# Altium PCB ALCT_MEZ_LX150T.PcbDoc (part 4 of 9)
Units mil, origin at the board's own origin, x right, y up, seen from the top; angles counter-clockwise.
Board outline 4101.98 x 5875.01 mil, 12 copper layers (Top Layer, Mid-Layer 1, +3V3, Mid-Layer 2, +1V2, Mid-Layer 4, +2V5, Mid-Layer 5, GND1, Mid-Layer 7, GND2, Bottom Layer), stack 64.7 mil thick; 378 components, 616 nets, 2492 pads, 1686 vias.
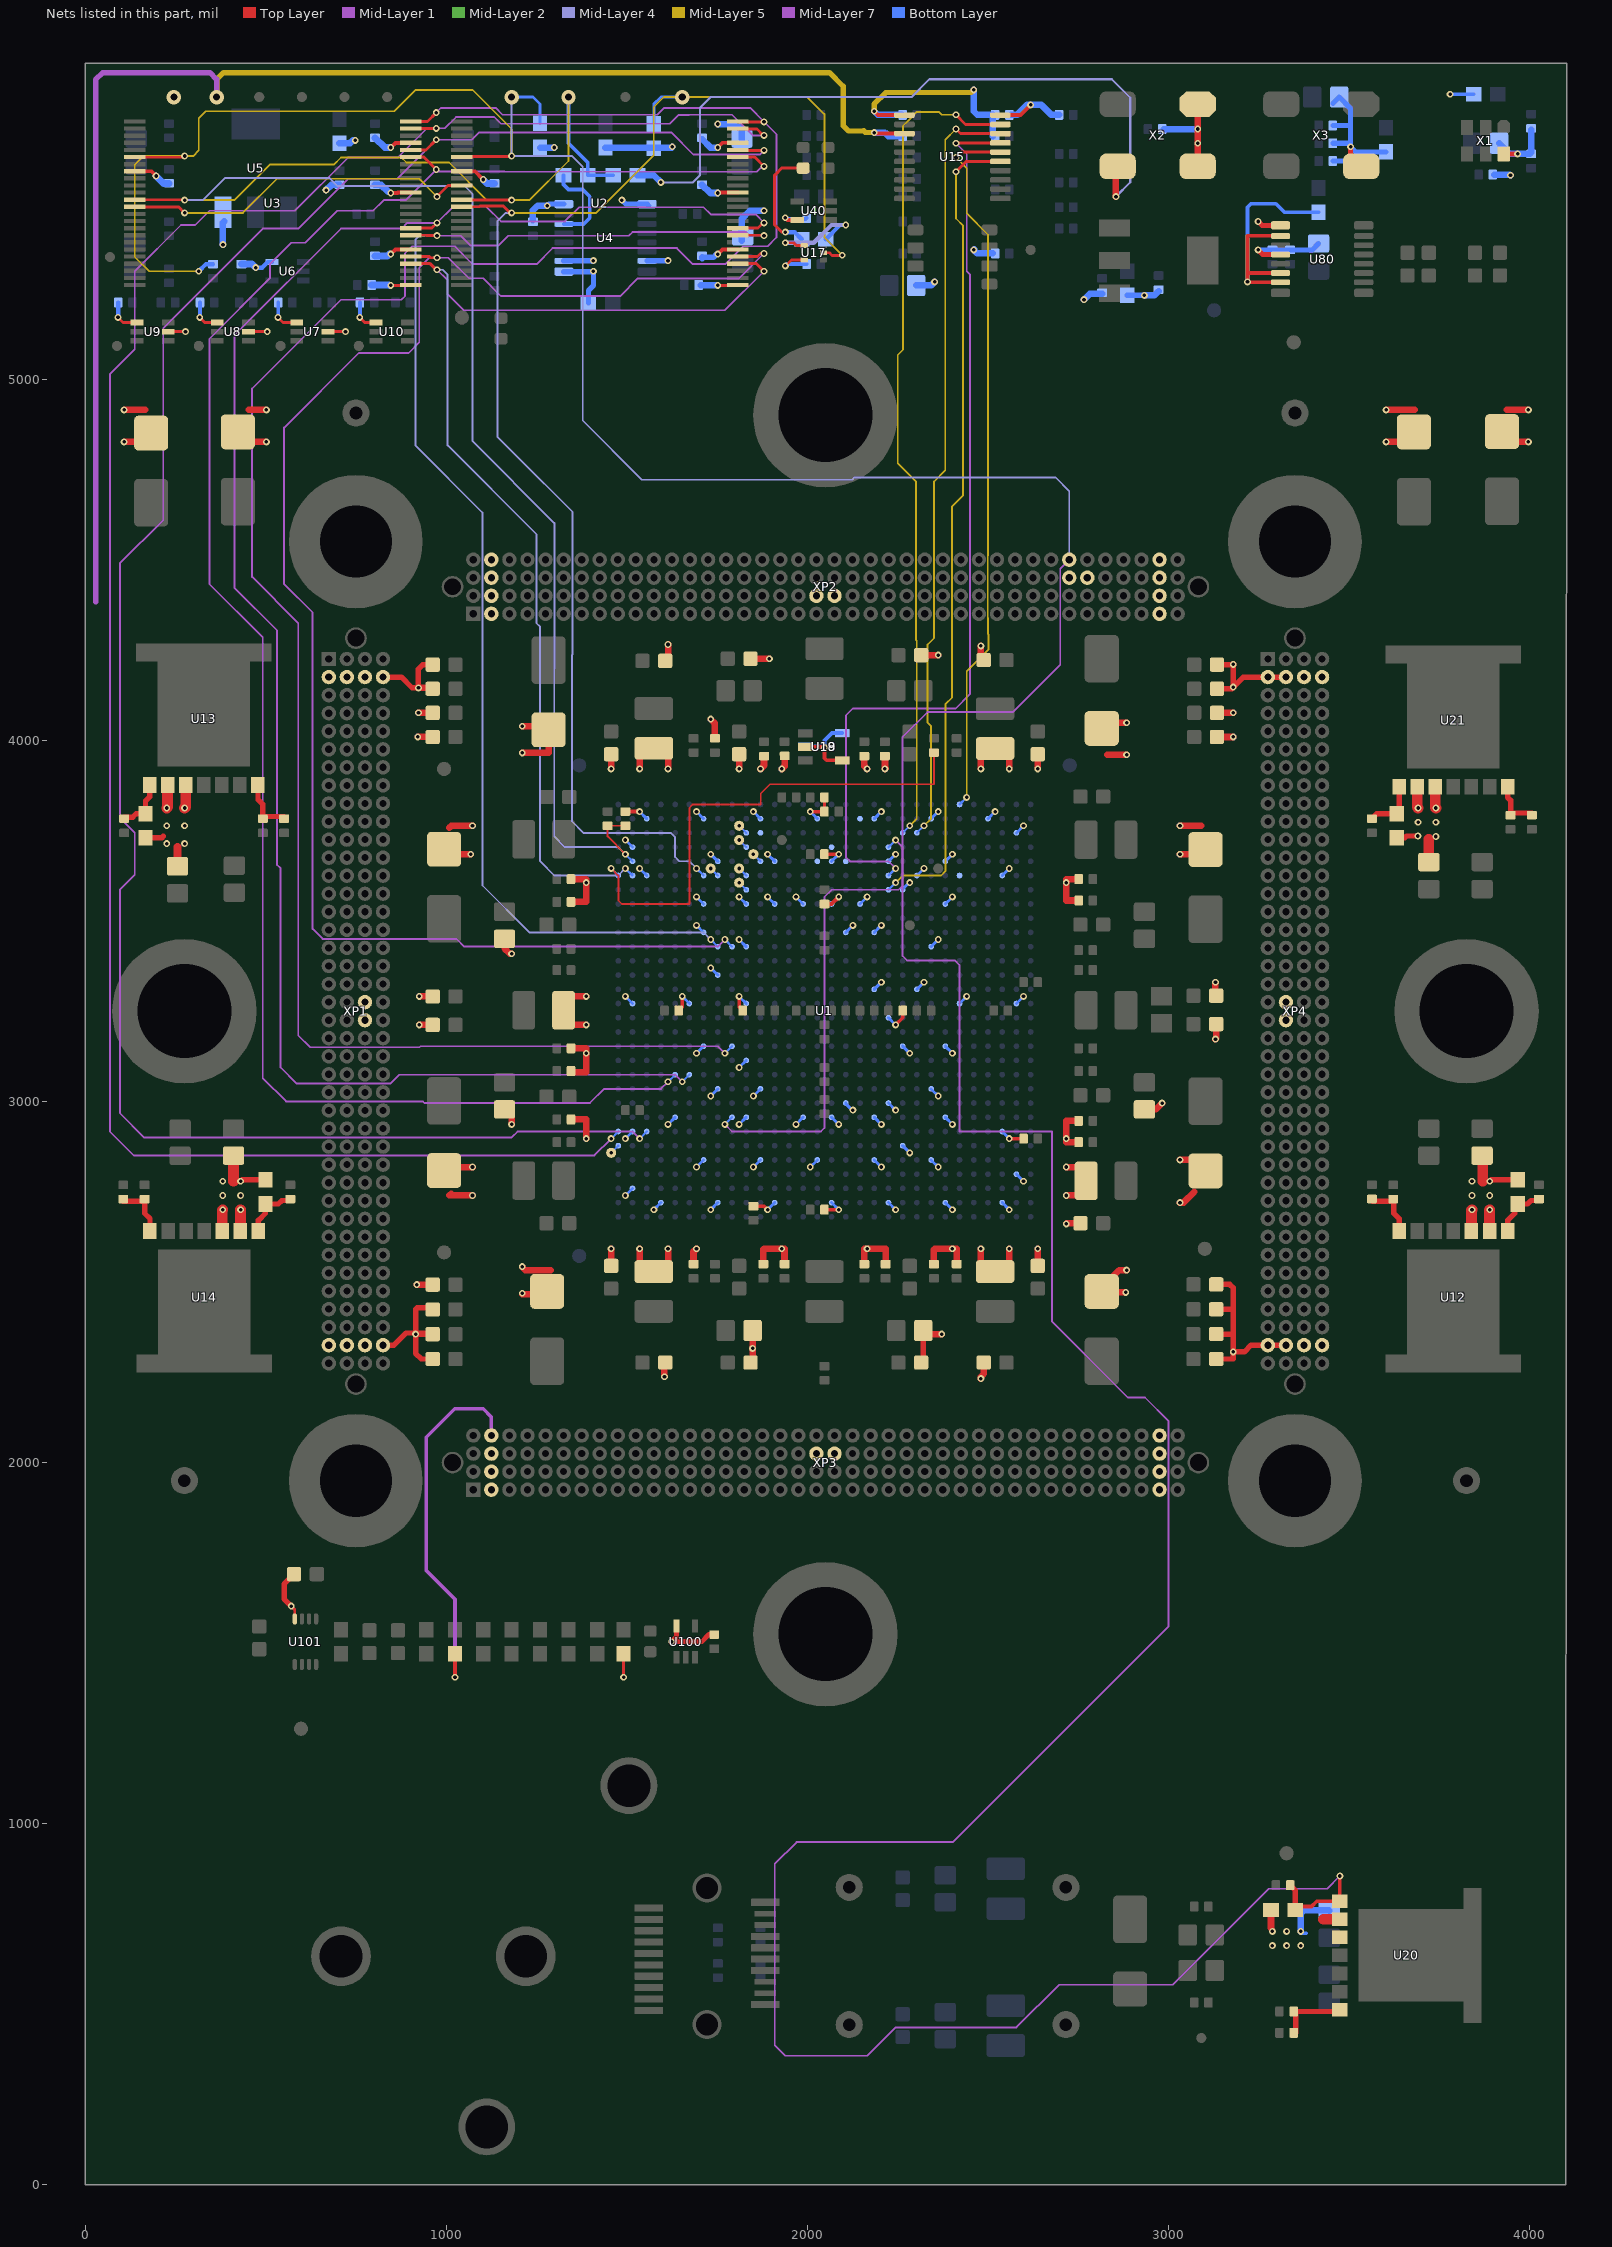
[diagram p13: the nets of this part, all layers, seen from the top]

## Via types
v1: diameter 19, hole 10, Top Layer to Bottom Layer, tented both sides, 1667 vias
v2: diameter 40, hole 20, Top Layer to Bottom Layer, 12 vias
v3: diameter 19, hole 10, Top Layer to Bottom Layer, 7 vias

## Nets (pads, with @x,y where several pads share a name; then routed paths per layer and width w, separated by ;. In a path a pad name is that pad's centre, name@x,y a point inside that pad or via, vN(x,y) a via of type N, cw(c..) or ccw(c..) an arc to the next point about the centre after c; other vN are vias at no path point) (continued)
+3V3: 3V3.1 C1.1 C2.1 C3.1 C6.1 C17.1 C28.1 C29.1 C30.1 C32.1 C40.1 C42.1 C44.1 C46.1 C50.1 C51.1 C52.1 C53.1 C54.1 C61.1 C62.1 C63.1 C64.1 C65.1 C72.1 C73.1 C74.1 C75.1 C76.1 C77.1 C78.1 C82.1 C83.1 C84.1 C85.1 C99.1 C109.1 C118.1 C119.1 C120.1 C121.1 C122.1 C126.1 C127.1 C128.1 C132.1 C133.1 C134.1 C135.1 C139.1 C140.1 C141.1 C145.1 C146.1 C147.1 C148.1 C201.1 C202.1 C203.1 C204.1 C205.1 C211.1 C212.1 C213.1 C214.1 C215.1 C221.1 C222.1 C223.1 C224.1 C225.1 C231.1 C232.1 C233.1 C234.1 C235.1 C241.1 C242.1 C243.1 C244.1 C251.1 C252.1 C253.1 C254.1 C301.1 C302.1 C311.1 C312.1 C321.1 C322.1 C331.1 C332.1 C341.1 C342.1 C351.1 C401.1 C411.1 C421.1 C431.1 C441.1 C451.1 CT1.1 CT2.1 CT3.1 CT4.1 CT5.1 CT6.1 R2.1 R5.1 R13.1 R16.1 R20.1 R26.1 R40.1 R42.1 R43.1 R44.1 R51.2 R55.1 R56.1 R58.1 R81.1 R82.1 R107.1 U1.AA8 U1.AA12 U1.AA16 U1.AA20 U1.AA23 U1.AC2 U1.AC10 U1.AC18 U1.AC26 U1.AD5 U1.AD13 U1.AD21 U1.AD23 U1.AD29 U1.AE16 U1.AF8 U1.AG2 U1.AH25 U1.AH29 U1.AJ3 U1.AJ7 U1.AJ16 U1.AJ27 U1.B4 U1.B16 U1.B28 U1.C2 U1.C7 U1.C25 U1.D29 U1.F16 U1.G2 U1.G8 U1.G13 U1.G23 U1.G26 U1.H5 U1.H10 U1.H20 U1.H29 U1.J17 U1.J25 U1.K6 U1.K13 U1.K24 U1.L2 U1.L9 U1.L15 U1.L26 U1.M5 U1.M8 U1.M17 U1.M21 U1.M29 U1.N23 U1.P9 U1.P21 U1.R2 U1.R8 U1.R23 U1.R26 U1.T5 U1.T29 U1.U8 U1.U23 U1.W2 U1.W23 U1.W26 U1.Y5 U1.Y10 U1.Y29 U2.8 U2.30 U2.38 U2.45 U3.8 U3.30 U3.38 U3.45 U4.1 U4.7 U4.9 U4.10 U4.16 U5.3 U6.5 U7.1 U7.5 U8.1 U8.5 U9.1 U9.5 U10.1 U12.2 U12.3 U13.2 U13.3 U15.20 U17.5 U18.2 U18.4 U19.2 U19.4 U20.2 U20.3 U40.5 U80.1 U80.4 U100.5 U101.8 X1.6 X2.1 X2.4 X3.4 XP1.A2 XP1.A39 XP1.B2 XP1.B39 XP1.C21 XP2.B21 XP2.C2 XP2.C39 XP2.D2 XP2.D39 XP3.A2 XP3.A39 XP3.B2 XP3.B39 XP3.C21 XP4.B21 XP4.C2 XP4.C39 XP4.D2 XP4.D39 | length 13269.6
  Top Layer w8: v1(91.21,5170.67) 104.99,5156.9 U9.1@143.7,5156.9 U9.1@146.33,5156.9 ; U9.5@232.94,5131.3 v1(278.22,5131.3) ; v1(317.59,5170.67) 331.37,5156.9 U8.1@366.14,5156.9 U8.1@372.7,5156.9 ; U8.5@459.32,5131.3 v1(504.59,5131.3) ; v1(534.12,5170.67) 547.9,5156.9 U7.1@585.96,5156.9 U7.1@589.24,5156.9 ; v1(570.87,1602.56) 580.71,1592.72 U101.8@580.71,1567.13 ; U7.5@675.85,5131.3 v1(721.13,5131.3) ; v1(760.5,5170.67) 774.28,5156.9 U10.1@805.77,5156.9 U10.1@815.62,5156.9 ; v1(1491.14,1405.56) R107.1@1491.14,1460.67 ; v1(1938.98,5313.39) 1955.71,5330.12 U17.5@1991.14,5330.12 ; C222.1@2047.24,3802.56 R13.1@2047.24,3841.93
  Top Layer w10: C202.1@1643.7,3251.38 1653.56,3261.24 v1(1653.56,3290.75) ; v1(1751.97,5641.15) 1764.96,5654.14 U2.45@1807.09,5654.14 ; v1(1811.03,3290.75) 1811.03,3261.22 C221.1@1820.87,3251.38 ; C232.1@1850.39,2710.04 1879.92,2710.04 v1(1889.76,2700.2) ; U18.2@1994.09,3981.7 2045.28,3981.7 v1(2047.24,3979.73) 2047.24,3950.2 2053.15,3944.3 U18.4@2096.46,3944.3 ; v1(2007.88,3802.54) C222.1@2047.24,3802.56 ; C242.1@2047.24,2700.2 v1(2086.61,2700.2) ; C211.1@2047.24,3684.45 v1(2086.63,3684.45) ; v1(2244.09,3212) 2263.78,3231.68 C212.1@2263.78,3251.38 ; C135.1@2314.96,2276.97 C135.1@2320.87,2282.88 ; v1(2559.06,2897.05) C252.1@2598.43,2897.05 ; U12.2@3888.58,2631.3 3889.37,2632.09 U12.2@3889.37,2641.15
  Top Layer w11: U3.8@137.8,5575.4 183.86,5575.4 v1(196.85,5562.41) ; v1(846.46,5345.87) 859.45,5358.86 U3.30@901.57,5358.86 ; v1(846.46,5515.16) 864.96,5515.16 866.14,5516.34 U3.38@901.57,5516.34 ; v1(846.46,5641.15) 859.45,5654.14 U3.45@901.57,5654.14 ; U2.8@1043.31,5575.4 1079.53,5575.4 v1(1102.36,5552.56) ; v1@1748.03,5515.16 1749.21,5516.34 U2.38@1807.09,5516.34 ; v1(1751.97,5345.87) 1764.96,5358.86 U2.30@1807.09,5358.86 ; v1@1938.74,5446.18 1944.56,5440.36 U40.5@1972.44,5440.36 ; U15.20@2534.45,5730.71 2589.57,5730.71 v1(2618.11,5759.26)
  Top Layer w12: R56.1@1496.06,3802.56 v1(1535.45,3802.54) ; C223.1@2047.24,3546.66 2066.95,3546.66 v1(2086.63,3566.33)
  Top Layer w14: U100.5@1637.8,1547.45 1637.8,1517.92 v1(1624.02,1504.14) 1707.46,1504.14 1727.14,1523.82 C109.1@1742.13,1523.82 ; v1(3248.03,5357.68) 3260.83,5344.89 U80.4@3310.04,5344.89 ; v1(3248.03,5436.42) 3258.86,5425.6 U80.1@3310.04,5425.6 ; v1(3503.94,5643.12) 3503.94,5618.51 X3.4@3523.62,5598.82 ; X1.6@3927.95,5623.43 v1(3966.54,5623.43)
  Top Layer w15: R5.1@167.32,3729.73 212.6,3729.73 216.54,3733.67 ; v1(570.87,1602.56) 551.18,1622.25 551.18,1663.59 C118.1@578.74,1691.15 ; C135.1@2320.87,2282.88 C332.1@2320.87,2365.56 ; v1(3889.37,2778.94) 3893.31,2782.88 R16.1@3958.27,2782.88
  Top Layer w18: v1(108.27,4826.19) 157.48,4826.19 CT1.1@185.04,4853.75 ; v1(108.27,4914.77) 167.32,4914.77 ; CT2.1@429.13,4854.53 457.48,4826.19 v1(501.97,4826.19) ; 452.76,4914.77 v1(501.97,4914.77) ; v1(918.5,2492.72) C122.1@960.63,2492.72 ; v1(921.26,4009.26) C139.1@962.6,4009.26 967.72,4009.26 C139.1@968.5,4008.47 ; v1(925.2,3290.75) 961.42,3290.75 C121.1@968.5,3283.67 ; CT3.1@996.06,2807.68 1006.69,2818.31 v1(1072.83,2818.31) ; 1008.86,3758.27 1013.78,3763.19 v1(1072.83,3763.19) ; 1013.78,2744.49 1008.86,2739.57 v1(1072.83,2739.57) ; CT5.1@1021.16,3684.45 v1(1067.91,3684.45) ; C312.1@1161.42,2977.76 1181.1,2958.08 v1(1181.1,2936.42) ; C302.1@1161.42,3450.2 1161.42,3423.63 1176.18,3408.86 v1(1181.1,3408.86) ; C201.1@1342.52,3147.05 C201.1@1345.49,3147.05 1387.8,3147.05 v1(1387.8,3133.27) 1387.8,3080.12 C225.1@1345.49,3080.12 ; C234.1@1345.49,2950.2 1387.8,2950.2 v1(1387.8,2897.05) ; C243.1@1345.49,3552.56 1387.8,3552.56 v1(1387.8,3605.71) 1387.8,3615.56 C213.1@1345.49,3615.56 ; v1(1387.8,3212.01) 1324.8,3212.01 C421.1@1324.8,3252.56 1324.8,3290.75 v1(1387.8,3290.75) ; C331.1@1456.69,2546.87 v1(1456.69,2591.93) ; v1(1456.69,3920.67) C311.1@1456.69,3961.23 ; v1(1535.43,2591.93) 1535.43,2528.94 C431.1@1574.8,2528.94 1614.17,2528.94 v1(1614.17,2591.93) ; v1(1535.43,3920.67) 1535.43,3977.76 C411.1@1574.8,3977.76 1614.17,3977.76 v1(1614.17,3920.67) ; C411.1@1573.71,3978.85 1574.8,3979.94 C411.1@1575.89,3978.85 ; C431.1@1574.41,2528.55 1574.8,2528.16 C431.1@1575.2,2528.55 ; v1(1604.33,2237.6) 1604.33,2275.01 C126.1@1606.3,2276.97 ; C2.1@1606.3,4219.89 1614.17,4227.76 v1(1614.17,4265.16) ; v1(1732.28,4058.47) 1744.09,4046.66 R51.2@1744.09,4011.23 ; v1(1811.02,3920.67) C321.1@1811.02,3961.23 ; C127.1@1842.52,2276.97 1848.43,2282.88 v1(1848.43,2316.34) C322.1@1848.43,2365.56 ; C120.1@1842.52,4225.79 v1(1894.68,4225.79) ; 1877.95,2589.97 1879.92,2591.93 v1(1929.13,2591.93) ; C203.1@2157.48,2549.63 2157.48,2591.93 v1(2165.35,2591.93) 2216.54,2591.93 C204.1@2216.54,2549.63 ; v1(2214.57,3920.67) v1@2216.54,3922.64 ; C140.1@2312.99,4235.64 C140.1@2314.96,4235.64 v1(2362.2,4235.64) ; C332.1@2320.87,2365.56 2330.71,2355.71 v1(2372.05,2355.71) ; C254.1@2350.39,2549.63 2350.39,2589.97 2352.36,2591.93 v1(2401.57,2591.93) 2413.39,2591.93 C241.1@2413.39,2549.63 ; v1(2480.32,2232.68) 2480.32,2237.6 2488.19,2245.48 C128.1@2488.19,2276.97 ; v1(2480.32,2591.93) 2480.32,2528.16 2559.06,2528.16 v1(2559.06,2591.93) ; v1(2480.32,3920.67) 2480.32,3979.94 2559.06,3979.94 v1(2559.06,3920.67) ; v1(2480.32,4261.23) 2480.32,4229.73 C1.1@2488.19,4221.86 ; C341.1@2637.8,2546.87 v1(2637.8,2591.93) ; v1(2637.8,3920.67) C351.1@2637.8,3961.23 ; v1(2716.54,2660.83) 2717.72,2662.01 C301.1@2752.94,2662.01 ; v1(2716.54,2739.57) 2771.65,2739.57 C401.1@2771.65,2780.12 2771.65,2818.31 v1(2716.54,2818.31) ; 2716.54,3556.5 v1(2716.54,3605.71) 2716.54,3615.56 C214.1@2750.97,3615.56 ; C235.1@2750.97,2887.21 2716.54,2887.21 v1(2716.54,2897.05) 2716.54,2946.27 C253.1@2750.97,2946.27 ; CT4.1@2811.02,4024.22 2835.43,4048.63 v1(2883.86,4048.63) ; 2829.72,3960.05 v1(2883.86,3960.05) ; C342.1@2933.07,2977.76 2964.57,2977.76 v1(2982.28,2995.48) ; v1(3031.5,2719.89) 3041.34,2719.89 3070.87,2749.41 ; v1(3031.5,2838) CT6.1@3072.05,2838 ; X2.4@3080.71,5588.98 X2.1@3080.71,5761.23 ; v1(3129.92,3330.12) 3129.92,3294.69 C134.1@3131.89,3292.72 ; C141.1@3133.86,4008.47 C141.1@3134.65,4009.26 ; C132.1@3134.65,4076.19 v1(3179.13,4076.19)
  Top Layer w19: C233.1@1685.04,2549.63 1685.04,2584.06 v1(1692.91,2591.93) ; v1(1870.08,3920.67) 1879.92,3930.52 C205.1@1879.92,3956.35 ; C224.1@1877.95,2549.63 1877.95,2589.97 ; v1(1929.13,3920.67) 1937.18,3928.72 C30.1@1937.18,3956.56 ; C231.1@1937.01,2549.63 v1@1937.01,2591.93 ; C251.1@2157.48,3956.35 2157.48,3928.55 v1(2165.35,3920.67) ; v1(2214.57,3920.67) C215.1@2214.57,3956.35 ; 2716.54,3556.5 C244.1@2750.97,3556.5 ; C141.1@3133.86,4009.26 3134.65,4009.26 v1(3179.13,4009.26) ; 3283.46,711.82 R2.1@3283.46,761.03 R2.1@3283.46,770.87
  Top Layer w22: C6.1@255.91,3650.99 255.91,3704.14
  Top Layer w24.02: U12.3@3838.58,2631.3 U12.3@3838.58,2641.15 v1(3840.16,2700.2)
  Top Layer w30: v1(226.38,3812.41) 228.74,3814.77 U13.2@228.74,3876.19 ; v1(275.59,3812.41) 278.74,3815.56 U13.3@278.74,3876.19 ; 3429.13,735.44 U20.2@3474.41,735.44 ; U12.3@3838.58,2641.15 3838.58,2698.63 v1(3840.16,2700.2) ; 3869.69,2778.94 C17.1@3869.69,2849.81 ; U12.2@3888.58,2641.15 3889.37,2641.93 v1(3889.37,2700.2) 3888.58,2699.41 U12.2@3888.58,2641.15
  Bottom Layer w8: v1@1496.08,2739.57 U1.AJ3@1515.75,2759.26 ; v1(1496.06,2897.05) U1.AJ7@1515.75,2916.74 ; v1(1496.07,3290.75) U1.AJ16@1515.75,3271.07 ; v1(1496.08,3723.82) U1.AJ27@1515.75,3704.14 ; v1(1535.44,3645.07) U1.AH25@1555.12,3625.4 ; v1(1535.45,3802.54) U1.AH29@1555.12,3782.88 ; v1(1574.81,2700.2) U1.AG2@1594.49,2719.89 ; v1(1614.18,2936.42) U1.AF8@1633.86,2956.11 ; v1(1653.56,3290.75) U1.AE16@1673.23,3271.07 ; v1(1692.91,2818.31) U1.AD5@1712.6,2838 ; v1(1692.93,3133.27) U1.AD13@1712.6,3152.96 ; v1(1692.93,3487.6) U1.AD21@1712.6,3467.92 ; v1(1692.93,3566.33) U1.AD23@1712.6,3546.66 ; v1(1692.93,3802.54) U1.AD29@1712.6,3782.88 ; v1(1732.3,2700.2) U1.AC2@1751.98,2719.88 ; v1(1732.29,3015.15) U1.AC10@1751.98,3034.83 ; v1(1732.29,3369.48) U1.AC18@1751.98,3349.8 ; v1(1732.29,3684.45) U1.AC26@1751.98,3664.77 ; v1(1811.03,2936.42) U1.AA8@1830.71,2956.11 ; v1(1811.03,3093.9) U1.AA12@1830.71,3113.59 ; v1(1811.03,3290.75) U1.AA16@1830.71,3271.07 ; v1(1811.03,3448.19) U1.AA20@1830.71,3428.52 ; v1(1811.03,3566.33) U1.AA23@1830.71,3546.66 ; v1(1850.39,2818.31) U1.Y5@1870.08,2838 ; v1(1850.39,3015.16) U1.Y10@1870.08,3034.85 ; v1(1850.4,3802.54) U1.Y29@1870.08,3782.88 ; v1@1889.78,2700.2 U1.W2@1909.45,2719.89 ; v1(1889.78,3566.33) U1.W23@1909.45,3546.66 ; v1(1889.78,3684.45) U1.W26@1909.45,3664.77 ; v1(1968.5,2936.42) U1.U8@1988.19,2956.11 ; v1(1968.51,3566.33) U1.U23@1988.19,3546.66 ; v1(2007.87,2818.31) U1.T5@2027.56,2838 ; v1(2007.88,3802.54) U1.T29@2027.56,3782.88 ; U1.R2@2066.93,2719.89 v1(2086.61,2700.2) ; U1.R8@2066.93,2956.11 v1@2086.61,2936.43 ; U1.R23@2066.93,3546.66 v1(2086.63,3566.33) ; U1.R26@2066.93,3664.77 v1(2086.63,3684.45) ; U1.P9@2106.3,2995.48 2106.31,2993.5 2124.02,2975.79 v1(2125.98,2975.79) ; U1.P21@2106.3,3467.92 v1(2125.99,3487.6) ; U1.N23@2145.68,3546.65 v1(2165.36,3566.33) ; U1.M8@2185.04,2956.11 v1(2204.72,2936.42) ; U1.M17@2185.04,3310.44 v1(2204.73,3330.12) ; U1.M21@2185.04,3467.92 v1(2204.73,3487.6) ; U1.M29@2185.04,3782.88 v1(2204.72,3802.56) ; U1.M5@2185.04,2838 v1(2204.72,2818.31) ; U1.L2@2224.41,2719.89 v1(2244.09,2700.2) ; U1.L9@2224.41,2995.48 v1(2244.09,2975.78) ; U1.L15@2224.41,3231.7 v1(2244.09,3212) ; U1.L26@2224.41,3664.77 v1(2244.09,3684.45) ; U1.K6@2263.78,2877.37 v1(2283.46,2857.68) ; U1.K13@2263.78,3152.96 v1(2283.48,3133.27) ; U1.K24@2263.79,3586.02 2263.79,3588.01 v1@2281.5,3605.71 ; U1.J17@2303.15,3310.44 v1(2322.84,3330.12) ; U1.J25@2303.15,3625.4 v1(2322.83,3645.08) ; U1.H5@2342.52,2838 v1(2362.2,2818.31) ; U1.H10@2342.52,3034.85 v1(2362.21,3015.15) ; U1.H20@2342.53,3428.52 v1(2362.2,3448.19) ; U1.H29@2342.52,3782.88 v1(2362.2,3802.56) ; U1.G2@2381.89,2719.89 v1(2401.57,2700.2) ; U1.G8@2381.89,2956.11 v1(2401.58,2936.42) ; U1.G13@2381.89,3152.96 v1(2401.58,3133.27) ; U1.G23@2381.89,3546.66 v1(2401.58,3566.33) ; U1.G26@2381.89,3664.77 v1(2401.57,3684.45) ; U1.F16@2421.26,3271.07 v1(2440.94,3290.75) ; U1.D29@2500,3782.88 v1(2519.68,3802.55) ; U1.C2@2539.38,2719.88 v1(2559.06,2700.2) ; U1.C7@2539.38,2916.73 v1(2559.06,2897.05) ; U1.C25@2539.38,3625.38 v1(2559.06,3645.07) ; U1.B4@2578.74,2798.62 v1(2598.43,2778.93) ; U1.B16@2578.74,3271.07 v1(2598.43,3290.75) ; U1.B28@2578.74,3743.51 v1(2598.42,3763.19)
  Bottom Layer w10: v1(317.59,5170.67) 318.24,5171.33 C42.1@318.24,5212.01 ; v1@383.86,5367.53 385.83,5369.49 v1@385.83,5372.25 ; v1(534.12,5170.67) 534.78,5171.33 C44.1@534.78,5212.01 ; R44.1@1255.91,5641.15 R44.1@1259.84,5641.15 ; U4.10@1332.69,5326.2 1401.59,5326.2 v1@1403.55,5324.23 ; v1(1407.48,5298.63) v1@1411.42,5298.63 ; U4.1@1556.1,5479.73 U4.1@1562.99,5479.73 ; U19.2@1994.09,3982.68 2044.29,3982.68 2047.24,3985.64 2047.24,3999.41 2067.91,4020.08 U19.4@2096.46,4020.08 ; v1(3366.14,701.97) 3371.26,696.86 3381.1,696.86 ; v1@3779.53,5790.75 3781.5,5788.79 R81.1@3844.49,5788.79
  Bottom Layer w11: v1(1938.74,5446.53) 1942.32,5442.95 1994.72,5442.95 C78.1@1998.03,5446.27 ; v1(1938.98,5313.39) 1943.9,5318.31 C75.1@1998.03,5318.31
  Bottom Layer w12: v1(91.21,5170.67) 91.86,5171.33 C40.1@91.86,5212.01 ; v1(472.44,5308.47) 490.16,5308.47 505.91,5324.22 U6.5@517.72,5324.22 ; v1(760.5,5170.67) 761.15,5171.33 C46.1@761.15,5212.01
  Bottom Layer w14: R58.1@1393.7,5210.05 1393.7,5245.48 1407.48,5259.26 v1(1407.48,5298.63) ; v1(3248.03,5357.68) C148.1@3287.4,5357.68 C147.1@3336.61,5357.68 3397.64,5357.68 C146.1@3415.35,5375.4 ; C145.1@3454.72,5603.75 3503.94,5603.75 ; C133.1@3454.72,5652.96 3503.94,5652.96 ; C119.1@3454.72,5702.17 3503.94,5702.17 ; C99.1@3454.72,5763.19 C99.1@3472.44,5780.91 3503.94,5749.42 3503.94,5702.17 ; R82.1@3602.36,5629.34 3517.72,5629.34 v1(3503.94,5643.12) 3503.94,5652.96 ; 3503.94,5652.96 3503.94,5702.17
  Bottom Layer w15: v1(1279.53,5479.73) 1284.45,5484.65 U4.16@1325.79,5484.65 ; U4.9@1325.79,5297.64 1406.5,5297.64 v1(1407.48,5298.63) ; U4.10@1325.79,5327.17 1406.5,5327.17 v1(1407.48,5328.16) ; v1(1486.22,5495.48) 1497.05,5484.65 U4.1@1556.1,5484.65 ; U4.7@1556.1,5327.17 1613.19,5327.17 v1(1614.17,5328.16) ; C62.1@1708.66,5337.21 1739.37,5337.21 v1@1748.03,5345.87 ; R55.1@2885.83,5231.7 v1(2933.07,5231.7)
  Bottom Layer w18: v1(381.89,5372.25) 381.89,5432.49 U5.3@385.83,5436.42 ; C74.1@1240.16,5440.36 1240.16,5467.13 1252.76,5479.73 v1(1279.53,5479.73) ; R44.1@1259.84,5641.15 v1(1299.21,5641.15) ; R43.1@1440.94,5641.15 1624.02,5641.15 v1(1625.98,5643.12) ; C62.1@1708.66,5334.06 C62.1@1708.66,5337.21 ; C64.1@1708.66,5664 1731.51,5641.15 v1(1751.97,5641.15) ; v1(1751.97,5706.11) 1806.1,5706.11 1818.9,5693.31 C54.1@1818.9,5665.95 ; C65.1@1818.9,5382.49 1818.9,5444.3 1840.55,5465.95 v1@1877.95,5465.95 ; C29.1@2301.18,5259.26 2342.52,5259.26 v1(2352.36,5269.1) ; v1@2462.6,5359.65 v1(2460.63,5357.68) 2470.47,5347.84 R26.1@2513.78,5347.84 ; 2608.27,5759.26 v1(2618.11,5759.26) 2647.64,5759.26 ; v1(2765.75,5219.89) 2781.5,5235.64 C32.1@2816.19,5235.64 ; v1(2933.07,5231.7) 2960.63,5231.7 C76.1@2972.44,5243.51 ; C77.1@2986.22,5692.33 v1(3080.71,5692.33) ; v1(3366.14,701.97) 3366.14,751.19 3375.98,761.03 3442.91,761.03 C3.1@3444.88,759.06 ; C83.1@3901.57,5566.34 3944.88,5566.34 v1(3946.85,5564.38) ; C82.1@3915.35,5652.96 3944.88,5623.43 v1(3966.54,5623.43) 4000,5623.43 4003.94,5627.37 C84.1@4003.94,5690.36
  Bottom Layer w19: v1(196.85,5562.41) 217.32,5541.93 C50.1@232.28,5541.93 ; C73.1@433.07,5318.31 462.6,5318.31 v1(472.44,5308.47) ; v1(667.32,5523.04) 682.28,5538 C72.1@704.72,5538 ; R40.1@704.72,5652.96 734.22,5652.96 v1@742.11,5660.85 ; C51.1@803.15,5341.15 837.8,5341.15 v1@842.52,5345.87 ; C52.1@803.15,5538 819.69,5538 v1@838.58,5519.1 ; C53.1@803.15,5667.93 829.94,5641.15 v1@842.52,5641.15 ; v1(1102.36,5552.56) 1112.99,5541.93 C61.1@1133.86,5541.93 ; C63.1@1708.66,5538 1731.5,5515.16 v1(1751.97,5515.16) ; R20.1@2564.96,5731.7 2580.71,5731.7 2608.27,5759.26 ; 2647.64,5759.26 2675.2,5731.7 C28.1@2696.85,5731.7
  other v1: 3287.4,662.6 3326.77,662.6 3366.14,662.6 3287.4,701.97 3326.77,701.97 1496.06,2739.57 3840.16,2739.57 3889.37,2739.57 3840.16,2778.94 2086.61,2936.42 2283.46,3605.71 226.38,3713.98 275.59,3713.98 226.38,3763.19 275.59,3763.19 1879.92,5465.95 3080.71,5652.96 748.03,5660.83 3779.53,5788.79
  other v2: 246.06,5780.91
+3V3/2: C20.1 R20.2 R22.1 U15.1 | length 653.9
  Top Layer w11: v1(2185.04,5741.54) 2195.87,5730.71 U15.1@2268.7,5730.71
  Mid-Layer 5 w15: v1(2185.04,5741.54) 2185.04,5761.23 2217.32,5793.51 2453.54,5793.51 v1(2460.63,5800.6)
  Bottom Layer w18: v1(2185.04,5741.54) 2194.88,5731.7 C20.1@2259.84,5731.7 ; v1(2460.63,5800.6) 2460.63,5741.54 2470.47,5731.7 2513.78,5731.7 R22.1@2513.78,5672.64
+VCORE: C9.1 C10.1 C11.1 C14.1 C22.1 C123.1 C124.1 C125.1 C129.1 C130.1 C131.1 C136.1 C137.1 C138.1 C142.1 C143.1 C144.1 CT8.1 CT9.1 CT10.1 CT11.1 CT12.1 CT13.1 R8.1 R11.1 R100.1 U14.2 U14.3 U15.3 U21.2 U21.3 VCORE.1 XP1.C2 XP1.C20 XP1.C39 XP1.D2 XP1.D39 XP2.A2 XP2.A39 XP2.B2 XP2.B20 XP2.B39 XP3.C2 XP3.C20 XP3.C39 XP3.D2 XP3.D39 XP4.A2 XP4.A39 XP4.B2 XP4.B20 XP4.B39 | length 8278.2
  Top Layer w10: U14.2@429.77,2631.3 430.56,2632.09 U14.2@430.56,2641.15 ; v1(1024.41,1405.56) R100.1@1024.41,1460.67
  Top Layer w11: v1(2185.04,5682.49) 2187.99,5679.53 U15.3@2268.7,5679.53
  Top Layer w15: v1(430.56,2778.94) 434.5,2782.88 R8.1@499.46,2782.88 ; XP1.D39@825,2325.01 855.12,2325.01 888.98,2358.86 v1@915.35,2358.86 ; XP1.D2@825,4175.01 875.98,4175.01 905.91,4145.08 v1(923.23,4145.08) ; v1@922.44,4145.87 922.44,4196.27 935.43,4209.26 C142.1@962.6,4209.26 ; C10.1@962.6,2286.82 931.1,2286.82 915.35,2302.56 v1(915.35,2355.71) 957.48,2355.71 960.63,2358.86 v1@915.35,2358.86 ; C125.1@962.6,2424.09 958.14,2428.55 919.29,2428.55 915.35,2424.61 v1@915.35,2358.86 ; C9.1@3131.89,2286.82 3179.13,2286.82 v1(3179.13,2306.5) ; C131.1@3131.89,2355.71 3174.21,2355.71 3179.13,2360.64 ; C138.1@3131.89,2424.61 3179.13,2424.61 ; C130.1@3131.89,2493.51 3169.29,2493.51 3179.13,2483.67 3179.13,2424.61 ; C144.1@3133.86,4209.26 3178.35,4209.26 3179.13,4208.47 v1(3179.13,4147.05) ; C136.1@3134.12,4142.59 3174.67,4142.59 v1(3179.13,4147.05) ; XP4.B39@3325,2325.01 XP4.A39@3275,2325.01 3228.35,2325.01 3209.84,2306.5 v1(3179.13,2306.5) ; XP4.B2@3325,4175.01 XP4.A2@3275,4175.01 3207.09,4175.01 v1(3179.13,4147.05) ; R11.1@3622.05,3729.73 R11.1@3631.89,3729.73 3653.54,3729.73 3658.66,3734.85 v1(3690.16,3734.85) ; v1(3179.13,2306.5) 3179.13,2360.64 ; 3179.13,2360.64 3179.13,2424.61
  Top Layer w18: v1(923.23,4076.19) 967.72,4076.19 C143.1@968.5,4075.4 ; v1(923.23,4145.08) 965.75,4145.08 C123.1@968.5,4142.33 ; v1(925.2,3212.01) C124.1@962.6,3212.01 967.72,3212.01 C124.1@968.5,3212.8 ; v1@1210.63,2466.44 1269,2466.44 CT12.1@1283.46,2480.91 ; v1(1210.63,2542.72) 1210.63,2540.76 1218.5,2532.88 1289.37,2532.88 ; v1(1210.63,3964.97) 1283.46,3964.97 CT11.1@1283.46,4024.22 ; v1(1210.63,4038.79) CT11.1@1264.76,4038.79 ; CT10.1@2811.02,2480.91 2862.99,2532.88 v1(2883.86,2532.88) ; CT10.1@2857.48,2471.36 v1(2881.4,2471.36) ; v1(3031.5,3684.45) 3089.37,3684.45 CT13.1@3102.36,3697.45 ; v1(3031.5,3763.19) 3090.55,3763.19 ; C9.1@3129.92,2295.87 C9.1@3131.89,2295.87 ; C131.1@3129.92,2362.8 C131.1@3131.89,2362.8 ; C130.1@3129.92,2496.66 C130.1@3131.89,2496.66 ; v1(3129.92,3172.64) 3131.89,3174.61 C137.1@3131.89,3213.98 ; v1@3178.35,4210.05 v1(3179.13,4210.05) ; v1(3602.36,4826.19) 3652.76,4826.19 CT8.1@3677.17,4850.6 ; v1(3602.36,4914.77) 3681.1,4914.77 ; CT9.1@3917.32,4853.75 3944.88,4826.19 v1(3996.06,4826.19) ; 3937.01,4914.77 v1(3996.06,4914.77)
  Top Layer w24.02: U14.3@379.77,2631.3 U14.3@379.77,2641.15 v1(381.35,2700.2)
  Top Layer w30: U14.3@379.77,2641.15 379.77,2698.63 v1(381.35,2700.2) ; 410.88,2778.94 C11.1@410.88,2849.81 ; U21.2@3688.58,3871.46 3688.58,3814.77 v1(3690.94,3812.41) ; C14.1@3720.47,3664.77 3720.47,3725.79 ; U21.3@3738.58,3871.46 3738.58,3813.98 v1(3740.16,3812.41) ; U14.2@429.77,2641.15 429.77,2699.41 v1(430.56,2700.2) 430.56,2641.93 U14.2@429.77,2641.15
  Mid-Layer 1 w15: 29.53,4383.27 29.53,5828.82 49.21,5848.51 345.79,5848.51 364.17,5830.12 v2(364.17,5780.91)
  Mid-Layer 5 w15: v2(364.17,5780.91) 364.17,5828.82 383.86,5848.51 2061.24,5848.51 2099,5810.75 2099,5701.6 2113.8,5686.8 2155.61,5686.8 2156.15,5687.34 2160.71,5682.79 2184.73,5682.79 v1(2185.04,5682.49)
  Mid-Layer 7 w10: v1(1024.41,1405.56) 1024.41,1621.46 944.88,1700.99 944.88,2070.28 1023.62,2149.02 1102.36,2149.02 1125,2126.38 XP3.D2@1125,2075.01
  Bottom Layer w18: v1(2185.04,5682.49) 2214.57,5682.49 2224.41,5672.64 C22.1@2259.84,5672.64
  other v1: 1210.63,2468.9 381.35,2739.57 430.56,2739.57 381.35,2778.94 3740.16,3733.67 3690.94,3773.04 3740.16,3773.04
/CEO: U2.10 U3.13 | length 984.8
  Top Layer w8: U3.13@137.8,5476.97 258.66,5476.97 v1(275.59,5460.05) ; v1(974.41,5505.32) 1005.12,5536.03 U2.10@1043.31,5536.03
  Mid-Layer 5 w5: v1(275.59,5460.05) 437.01,5460.05 531.5,5554.53 925.2,5554.53 v1(974.41,5505.32)
/CS: CSB.1 U1.AA27 | length 27.8
  Bottom Layer w6: v1(1811.03,3723.82) U1.AA27@1830.71,3704.14
/INIT: INITB.1 U1.AA28 | length 27.8
  Bottom Layer w6: v1(1811.03,3763.19) U1.AA28@1830.71,3743.51
/PROGR: PROGB.1 R41.2 R44.2 U1.AB8 U2.6 U3.6 XP2.D34 | length 7518.4
  Top Layer w8: U3.6@137.8,5614.77 138.32,5614.24 272.31,5614.24 v1(275.59,5617.53) ; U2.6@1043.44,5614.9 U2.6@1043.31,5614.77 1043.31,5615.9 1177.21,5615.9 1178.35,5614.77 v1(1181.1,5617.53)
  Mid-Layer 1 w5: v1(1771.66,2936.42) 1791.34,2916.74 2037.4,2916.74 2047.24,2926.58 2047.24,3566.34 2067.1,3586.2 2252.17,3586.2 2263.66,3597.69 2263.66,3928.78 2263.66,4009.14 2332.49,4077.97 2568.71,4077.97 2700,4209.26 2700,4475.01 ; 2700,4288.94 2700,4475.01 ; XP2.D34@2725,4500.01 2700,4475.01
  Mid-Layer 4 w5: v2(1181.1,5780.91) v1(1181.1,5617.53) 1348.43,5617.53 1377.95,5588 1377.95,4885.24 1541.69,4721.51 2123.94,4721.51 2130.19,4727.76 2687.01,4727.76 2725,4689.77 XP2.D34@2725,4500.01
  Mid-Layer 5 w5: v1(314.96,5298.63) 177.17,5298.63 137.8,5338 137.8,5593.9 161.42,5617.53 v1(275.59,5617.53) 299.21,5617.53 314.96,5633.27 314.96,5721.86 334.65,5741.54 856.3,5741.54 915.35,5800.6 1072.83,5800.6 1181.1,5692.33 v1(1181.1,5617.53)
  Bottom Layer w6: v1(1771.66,2936.42) U1.AB8@1791.34,2956.11
  Bottom Layer w8: v2(1181.1,5780.91) 1240.16,5780.91 1259.84,5761.23 R44.2@1259.84,5708.08
  Bottom Layer w12: v1(314.96,5298.63) 334.65,5318.31 R41.2@354.33,5318.31
/WRITE: U1.Y26 WRITEB.1 | length 27.8
  Bottom Layer w6: v1(1850.39,3684.45) U1.Y26@1870.08,3664.77
A0: U1.R27
A1: U1.Y28
A2: U1.N29
A3: U1.T26
A4: U1.P26
A9: U1.F25
ADC_EOC: U1.K28 U15.19 | length 2301.9
  Top Layer w8: v1(2411.42,5731.7) 2437.99,5705.12 U15.19@2534.45,5705.12
  Mid-Layer 5 w5: 2277.56,5713.98 2264.64,5701.07 2264.64,5081.23 2250,5066.58 2250,4767.13 2300.5,4716.63 2300.5,4277.47 2302.97,4275.01 2302.97,3782.69 v1(2283.47,3763.19) ; 2303.28,5739.7 2364.05,5739.7 2372.05,5731.7 v1(2411.42,5731.7)
  Mid-Layer 5 w5.12: 2277.56,5713.98 2303.28,5739.7
  Bottom Layer w6: U1.K28@2263.78,3743.51 v1(2283.47,3763.19)
ADC_NCS: U1.L24 U15.15 | length 2283.5
  Top Layer w8: v1(2411.42,5574.22) 2439.96,5602.76 U15.15@2534.45,5602.76
  Mid-Layer 2 w5: v1(2244.09,3605.7) v1@2244.09,3610.21
  Mid-Layer 5 w5: v1(2244.09,3605.7) 2263.61,3625.21 2369.93,3625.21 2382.02,3637.3 2382.02,4099.92 2400.5,4118.4 2400.5,4648.07 2430.98,4678.55 ; v1(2411.42,5574.22) 2411.42,5444.56 2430.98,5425.01
  Mid-Layer 5 w5.12: 2430.98,4678.55 2430.98,5425.01
  Bottom Layer w6: U1.L24@2224.41,3586.02 v1(2244.09,3605.7)
ADC_SCK: U1.J28 U15.18 | length 2130.1
  Top Layer w8: v1(2411.42,5692.33) 2424.21,5679.53 U15.18@2534.45,5679.53
  Mid-Layer 5 w5: v1(2322.84,3763.19) 2342.52,3782.88 2342.52,4038.79 2332.68,4048.63 2332.68,4265.16 2350.5,4282.99 2350.5,4716.06 2381.89,4747.45 2381.89,5662.8 v1(2411.42,5692.33)
  Bottom Layer w6: U1.J28@2303.15,3743.51 v1(2322.84,3763.19)
ADC_SDI: U1.L25 U15.17 | length 2603.4
  Top Layer w8: v1(2411.42,5652.96) 2412.4,5653.94 U15.17@2534.45,5653.94
  Mid-Layer 7 w5: v1(2244.09,3645.07) 2224.59,3664.57 2118.3,3664.57 2106.49,3676.38 2106.49,4068.5 2125.98,4088 2410.63,4088 2450,4127.37 2450,5289.76 2441.13,5298.63 2441.13,5623.25 v1(2411.42,5652.96)
  Bottom Layer w6: U1.L25@2224.41,3625.4 v1(2244.09,3645.07)
ADC_SDO: U1.F30 U15.16 | length 1991.3
  Top Layer w8: v1(2411.42,5613.59) 2426.18,5628.35 U15.16@2534.45,5628.35
  Mid-Layer 5 w5: v1(2440.94,3841.93) 2440.94,4190.66 2501.32,4251.03 2501.32,4293.19 2499.82,4294.69 2499.82,4339.12 2499.5,4339.44 2499.5,4510.57 2500,4511.07 2500,4639.18 ; 2440.94,5584.06 2440.94,5459.06 2500,5400.01
  Mid-Layer 5 w5.12: v1(2411.42,5613.59) 2440.94,5584.06 ; 2500,4639.18 2500,5400.01
  Bottom Layer w6: U1.F30@2421.26,3822.25 v1(2440.94,3841.93)
AWAKE: AWAKE.1 U1.AA24 | length 27.8
  Bottom Layer w6: v1(1811.03,3605.7) U1.AA24@1830.71,3586.02
BUSY: BUSY.1 U1.AA25 | length 27.8
  Bottom Layer w6: v1(1811.03,3645.07) U1.AA25@1830.71,3625.4
CCLK: CCLK.1 R46.2 R47.2 R56.2 R57.1 U1.AJ26 U2.12 U3.12 | length 5071.5
  Top Layer w5: v1(1496.06,3684.45) 1446.85,3733.67 R57.1@1446.85,3763.19 R56.2@1496.06,3763.19
  Top Layer w8: U3.12@137.8,5496.66 274.41,5496.66 v1(275.59,5495.48) ; U2.12@1043.31,5495.48 v1@1177.17,5495.48
  Mid-Layer 4 w5: v1(275.59,5495.48) 325.96,5495.48 386.84,5556.36 677.12,5556.36 698.82,5534.66 1050.97,5534.66 1072.83,5512.8 1072.83,5425.79 ; 1299.21,3920.67 1299.21,3733.67 1328.74,3704.14 1476.38,3704.14 v1(1496.06,3684.45)
  Mid-Layer 4 w5.12: 1072.83,5425.79 1072.83,4828.16 1299.56,4601.43 1299.56,4196.61 1299.21,4196.27 1299.21,3920.67
  Mid-Layer 5 w5: v1(275.59,5495.48) 413.39,5495.48 511.81,5593.9 688.98,5593.9 708.66,5613.59 875.98,5613.59 889.95,5599.62 1008.06,5599.62 1112.2,5495.48 v1(1181.1,5495.48) 1230.32,5495.48 1338.58,5603.75 v2(1338.58,5780.91)
  Bottom Layer w6: v1(1496.06,3684.45) U1.AJ26@1515.75,3664.77
  Bottom Layer w10: v2(1338.58,5780.91) 1338.58,5652.96 1391.73,5599.81 R46.2@1391.73,5564.38 R47.2@1462.6,5564.38
CK20: R46.1 U4.14 | length 250.1
  Bottom Layer w10: R46.1@1324.8,5564.38 1324.8,5538.79 1338.58,5525.01 1377.95,5525.01 1397.64,5505.32 1397.64,5446.27 1380.91,5429.53 U4.14@1325.79,5429.53
ck33: R47.1 X2.3 | length 1997
  Top Layer w18: v1(2854.33,5505.32) 2854.33,5584.06 X2.3@2859.25,5588.98
  Mid-Layer 4 w6: v1(1594.49,5544.69) 1683.07,5544.69 1702.76,5564.38 1702.76,5751.48 1732.19,5780.91 2288.55,5780.91 2337.76,5830.12 2842.52,5830.12 2893.7,5778.94 2893.7,5544.69 v1(2854.33,5505.32)
  Bottom Layer w18: R47.1@1529.53,5564.38 1574.8,5564.38 v1(1594.49,5544.69)
CMPCS_B: CMPCSB.1 U1.AC25 | length 27.8
  Bottom Layer w6: v1(1732.29,3645.07) U1.AC25@1751.98,3625.38
CSI_B: R52.1 U1.AK25 | length 1395.5
  Top Layer w5: v1(1456.69,3645.08) 1476.58,3625.2 1476.58,3556.3 1486.22,3546.66 1673.23,3546.66 1673.23,3812.41 1683.07,3822.25 1870.89,3822.25 1870.89,3852.59 1896.37,3878.07 2350.39,3878.07 R52.1@2350.39,3960.04
  Mid-Layer 7 w5.12: v1(1456.69,3645.08) v1@1456.76,3645.02
  Bottom Layer w6: v1(1456.69,3645.08) U1.AK25@1476.38,3625.4
CSO_B: CSOB.1 U1.AK6 | length 27.8
  Bottom Layer w6: v1(1456.69,2857.68) U1.AK6@1476.38,2877.37
D0: U1.AJ25 U2.28 U3.28 | length 3236.3
  Top Layer w8: U3.28@901.57,5319.49 955.51,5319.49 v1@972.44,5302.56 ; U2.28@1807.09,5319.49 1859.06,5319.49 v1(1879.92,5298.63)
  Mid-Layer 4 w5.12: v1(974.41,5302.56) 990.16,5302.56 1003.94,5288.79 1003.94,4816.34 1250,4570.28 1250,4324.22 1259.72,4314.5 1259.72,3664.9 1299.09,3625.53 1476.53,3625.53 v1(1496.08,3645.07)
  Mid-Layer 7 w5: 1003.94,5234.65 1048.23,5190.36 1771.65,5190.36 v1(1879.92,5298.63)
  Mid-Layer 7 w5.12: v1(974.41,5302.56) 1003.94,5273.04 1003.94,5234.65
  Bottom Layer w6: v1(1496.08,3645.07) U1.AJ25@1515.75,3625.4 U1.AJ25@1515.76,3629.32
D1: U1.AB20 U2.29 U3.29 | length 4506.7
  Top Layer w8: U3.29@901.57,5339.18 953.54,5339.18 956.69,5336.03 v1(974.41,5336.03) ; U2.29@1807.09,5339.18 1861.42,5339.18 1870.08,5347.84 v1(1879.92,5347.84)
  Mid-Layer 7 w5: v1(1771.67,3448.19) 1752.02,3428.55 1050,3428.55 1028.54,3450.01 850,3450.01 657.68,3450.01 629.92,3477.76 629.92,4353.75 551.18,4432.49 551.18,4865.56 757.87,5072.25 895.67,5072.25 925.2,5101.78 925.2,5308.47 952.76,5336.03 v1(974.41,5336.03) 1005.91,5336.03 1062.99,5278.94 1102.36,5278.94 1151.57,5229.73 1481.3,5229.73 1530.33,5278.76 1810.84,5278.76 v1(1879.92,5347.84)
  Bottom Layer w6: v1(1771.67,3448.19) U1.AB20@1791.34,3428.52
D2: U1.AC20 U2.32 U3.32 | length 3733.8
  Top Layer w8: U3.32@901.57,5398.23 943.7,5398.23 944.88,5397.05 v1(974.41,5397.05) ; U2.32@1807.09,5398.23 1878.74,5398.23 v1(1879.92,5397.05)
  Mid-Layer 4 w5.12: v1(974.41,5397.05) 925.2,5397.05 915.35,5387.21 915.35,4815.21 1100.44,4630.12 1100.44,3597.79 1230.44,3467.79 1653.5,3467.79 ; v1(1732.3,3448.19) 1712.74,3467.75 1653.54,3467.75 ; 1653.5,3467.79 1653.54,3467.75
  Mid-Layer 7 w5.12: v1(974.41,5397.05) 1040.03,5397.05 1067.46,5369.62 1143.83,5369.62 1171.13,5396.93 1505.91,5396.93 1515.75,5406.77 1830.83,5406.77 1840.55,5397.05 v1(1879.92,5397.05)
  Bottom Layer w6: v1(1732.3,3448.19) U1.AC20@1751.98,3428.52
D3: U1.AE11 U2.33 U3.33 | length 5097.6
  Top Layer w8: U3.33@901.57,5417.92 959.84,5417.92 v1(974.41,5432.49) ; U2.33@1807.09,5417.92 1863.38,5417.92 v1@1877.94,5432.49
  Mid-Layer 7 w5: 541.34,3615.56 541.34,3635.24 ; v1(1653.56,3054.53) 1634.06,3074.03 870.48,3074.03 846.46,3050.01 585.24,3050.01 541.34,3093.9 541.34,3635.24 ; v1(1879.92,5432.49) 1856.48,5455.92 1732.28,5455.92 1712.41,5475.79 1368.11,5475.79 1328.74,5436.42 1151.59,5436.42 1110.44,5477.58 1019.5,5477.58 v1(974.41,5432.49) 891.73,5432.49 876.17,5416.92 708.85,5416.92 413.39,5121.46 413.39,4422.64 531.5,4304.53 531.5,3654.93 541.34,3645.08 541.34,3635.24
  Bottom Layer w6: v1(1653.56,3054.53) U1.AE11@1673.23,3074.22
D4: U1.AF11 U2.43 U3.43 | length 5241
  Top Layer w8: U3.43@901.57,5614.77 937.8,5614.77 v1(972.44,5580.12) ; U2.43@1807.09,5614.77 1854.13,5614.77 v1(1879.92,5588.98)
  Mid-Layer 7 w5: v1(1614.18,3054.53) 1594.37,3034.72 1437.01,3034.72 1397.95,2995.66 939.38,2995.66 935.04,3000.01 556.5,3000.01 492.13,3064.38 492.13,4284.85 344.49,4432.49 344.49,5111.62 511.81,5278.94 511.81,5318.31 570.87,5377.37 610.24,5377.37 698.82,5465.95 797.24,5465.95 826.96,5495.66 887.98,5495.66 v1(972.44,5580.12) 978.16,5574.4 1161.23,5574.4 1161.42,5574.22 1860.24,5574.22 1875,5588.98 v1(1879.92,5588.98)
  Bottom Layer w6: v1(1614.18,3054.53) U1.AF11@1633.86,3074.22
D5: U1.AH7 U2.44 U3.44 | length 5839.2
  Top Layer w8: U3.44@901.57,5634.45 944.09,5634.45 v1(972.44,5662.8) ; U2.44@1807.07,5633.28 v1@1877.95,5633.28
  Mid-Layer 7 w5: 900,2900.45 899.56,2900.01 164.37,2900.01 96.5,2967.88 96.5,3586.03 137.8,3627.32 137.8,3743.51 98.43,3782.88 96.5,3782.88 96.5,4489.62 216.54,4609.65 216.54,5141.15 492.13,5416.74 590.55,5416.74 728.35,5554.53 864.17,5554.53 v1(972.44,5662.8) 1070.85,5662.8 1090.35,5682.3 1624.02,5682.3 1684.67,5621.65 1868.3,5621.65 v1(1879.92,5633.27) ; 1181.1,2900.45 1197.27,2916.61 1515.88,2916.61 v1(1535.44,2897.05)
  Mid-Layer 7 w5.12: 900,2900.45 1181.1,2900.45
  Bottom Layer w6: v1(1535.44,2897.05) U1.AH7@1555.12,2916.74
D6: U1.AK7 U2.47 U3.47 | length 5983.1
  Top Layer w8: U3.47@901.57,5693.51 971.65,5693.51 v1(972.44,5694.3) ; U2.47@1807.07,5692.33 1860.23,5692.33 v1@1877.95,5674.61
  Mid-Layer 7 w5: 900,2850.45 899.56,2850.01 135.63,2850.01 68.9,2916.74 68.9,5013.19 137.8,5082.09 137.8,5298.63 265.75,5426.58 305.12,5426.58 344.49,5465.95 580.71,5465.95 728.35,5613.59 866.14,5613.59 946.85,5694.3 v1(972.44,5694.3) 996.06,5694.3 1027.36,5725.6 1133.07,5725.6 1151.57,5707.09 1619.28,5707.09 1643.7,5731.51 1673.04,5731.51 1673.23,5731.7 1791.34,5731.7 1848.43,5674.61 v1(1879.92,5674.61)
  Mid-Layer 7 w5.12: 900,2850.45 1410.09,2850.45 v1(1456.69,2897.05)
  Bottom Layer w6: v1(1456.69,2897.05) U1.AK7@1476.38,2916.74
D7: U1.AB13 U2.48 U3.48 | length 6279.6
  Top Layer w8: U3.48@901.57,5713.19 948.03,5713.19 v1(972.44,5737.6) ; U2.48@1807.07,5712.01 v1@1877.95,5712.01
  Mid-Layer 7 w5: v1(972.44,5737.6) 985.54,5750.7 1136.81,5750.7 1155.81,5731.7 1584.65,5731.7 1603.65,5750.7 1841.24,5750.7 v1(1879.92,5712.01) 1914.37,5677.56 1914.37,5392.13 1889.76,5367.53 1821.84,5367.53 1772.63,5318.31 1683.07,5318.31 1638.78,5362.6 1294.29,5362.6 1250.18,5318.5 1072.65,5318.5 1023.62,5367.53 905.51,5367.53 885.83,5347.84 885.83,5229.73 875.98,5219.89 708.66,5219.89 462.6,4973.82 462.6,4452.17 590.55,4324.22 590.55,3182.49 623.03,3150.01 926.03,3150.01 928.8,3152.77 1752.15,3152.77 v1(1771.66,3133.27) ; v1@1877.95,5712.01 v1@1878.94,5711.03
  Bottom Layer w6: v1(1771.66,3133.27) U1.AB13@1791.34,3152.96
din_pd: R83.1 U80.2 U80.6 U80.7 | length 822.8
  Top Layer w10: U80.7@3310.04,5268.12 3219.49,5268.12 v1(3218.5,5269.1) 3218.5,5298.63 ; U80.6@3310.04,5293.71 3223.43,5293.71 3218.5,5298.63 ; U80.2@3310.04,5396.07 3309.06,5397.05 3218.5,5397.05 3218.5,5298.63
  Bottom Layer w10: v1(3218.5,5269.1) 3218.5,5475.79 3228.35,5485.64 3297.24,5485.64 3320.87,5462.01 R83.1@3415.35,5462.01
DONE: DONE.1 R42.2 U1.AD25 U2.13 U17.2 | length 4103.2
  Top Layer w8: U2.13@1043.31,5476.97 1043.31,5477.08 1091.66,5477.08 1093.66,5479.08 1158.13,5479.08 v1@1177.17,5460.05 ; U17.2@2044.29,5349.81 2060.81,5349.81 2068.2,5342.42 v1@2095.95,5342.42
  Mid-Layer 4 w5: 1165.35,5460.05 1141.73,5436.42 1141.73,4839.97 1194.88,4786.82 ; 1348.56,3960.04 1348.43,3959.9 1348.43,3774.99 1379.9,3743.51 1622.06,3743.51 1633.68,3731.89 1633.68,3676.76 1645.48,3664.95 1673.04,3664.95 v1(1692.93,3645.07)
  Mid-Layer 4 w5.12: 1165.35,5460.05 v1(1181.1,5460.05) ; 1194.88,4786.82 1349.56,4632.14 1349.56,4236.64 1348.56,4235.64 1348.56,3960.04
  Mid-Layer 5 w5: 1387.8,5460.05 1415.35,5460.05 1574.8,5619.49 1574.8,5753.35 1602.36,5780.91 v2(1653.54,5780.91)
  Mid-Layer 5 w5.12: v1(1181.1,5460.05) 1387.8,5460.05 ; v2(1653.54,5780.91) 2000,5780.91 2047.24,5733.67 2047.24,5392.13 v1(2096.46,5342.92)
  Bottom Layer w6: v1(1692.93,3645.07) U1.AD25@1712.6,3625.4
  Bottom Layer w8: R42.2@1574.8,5706.11 1574.8,5761.23 1594.49,5780.91 v2(1653.54,5780.91)
DONE2: R45.1 U17.4 | length 314.6
  Top Layer w8: v1(1938.98,5377.37) 1961.12,5377.37 1969,5369.49 U17.4@1991.14,5369.49
  Mid-Layer 4 w12: v1(1938.98,5377.37) 2017.72,5377.37 2066.93,5426.58 v1(2106.3,5426.58)
  Bottom Layer w12: R45.1@2051.18,5387.21 2090.55,5426.58 v1(2106.3,5426.58)
DONE_LED: D1.A R45.2 | length 315.8
  Top Layer w8: v1(1938.98,5406.9) 1929.13,5406.9 1909.45,5426.58 1909.45,5564.38 1929.13,5584.06 D1.A@1988.19,5584.06
  Bottom Layer w12: v1(1938.98,5406.9) 1964.57,5406.9 R45.2@1984.25,5387.21
DXN: XP2.C35
DXP: XP2.C34
en_1v2: C13.1 R8.2 U14.1 | length 155.9
  Top Layer w15: U14.1@479.77,2641.15 479.77,2670.67 499.46,2690.36 R8.2@499.46,2715.95 534.89,2715.95 544.74,2725.79 C13.1@568.36,2725.79
en_1v2mgt: C16.1 R11.2 U21.1 | length 152.2
  Top Layer w15: C16.1@3562.99,3782.88 3576.77,3796.66 R11.2@3631.89,3796.66 3638.58,3803.35 U21.1@3638.58,3871.46
en_1v8: C8.1 R5.2 U13.1 | length 147.4
  Top Layer w15: C8.1@108.27,3786.82 131.89,3786.82 141.73,3796.66 R5.2@167.32,3796.66 167.32,3832.09 178.74,3843.51 U13.1@178.74,3876.19
en_2v5_aux: C19.1 R16.2 U12.1 | length 155.9
  Top Layer w15: U12.1@3938.58,2641.15 3938.58,2670.67 3958.27,2690.36 3958.27,2715.95 3993.7,2715.95 4003.54,2725.79 C19.1@4027.17,2725.79
en_2v5_sfp: C5.1 R2.2 U1.L27 U20.1 | length 6686.3
  Top Layer w10: R2.2@3350.39,770.87 3395.67,770.87 3410.24,785.44 U20.1@3474.41,785.44 v3(3474.41,855.32)
  Top Layer w15: C5.1@3336.61,829.93 3350.39,816.15 R2.2@3350.39,770.87
  Mid-Layer 7 w5: v1(2244.09,3723.51) 2263.59,3704 2263.59,3402.56 2275.81,3390.34 2408.3,3390.34 2421.08,3377.56 2421.08,3361.41 2421.08,2916.92 2677.17,2916.92 2677.36,2916.72 2677.36,2389.74 2886.91,2180.18 2934.78,2180.18 3000,2114.96 3000,1546.9 2402.44,949.34 1969.98,949.34 1909.45,888.81 1909.45,387.01 1938.98,357.49 2165.35,357.49 2244.09,436.23 2578.74,436.23 2696.85,554.34 3011.81,554.34 3277.56,820.08 3439.17,820.08 v3(3474.41,855.32)
  Bottom Layer w6: U1.L27@2224.4,3703.83 v1(2244.09,3723.51)
en_ext_sel: R48.2 U2.25 | length 102.4
  Top Layer w8: v1@1748.04,5259.26 U2.25@1807.07,5259.26
  Bottom Layer w18: R48.2@1704.71,5259.26 v1@1748.03,5259.26
  other v1: 1751.97,5259.26
en_ext_sel_2: R49.2 U3.25 | length 108.7
  Top Layer w8: v1@842.53,5259.26 v1(846.46,5259.26) U3.25@901.56,5259.26
  Bottom Layer w19: R49.2@793.31,5260.44 841.34,5260.44 v1@842.52,5259.26
FB12: R7.2 R9.1 U14.7 | length 147.9
  Top Layer w15: R9.1@105.76,2723.82 164.81,2723.82 164.81,2690.36 179.77,2675.4 U14.7@179.77,2641.15
FB12_MGT: R10.2 R12.1 U21.7 | length 135.3
  Top Layer w15: U21.7@3938.58,3871.46 3938.58,3841.93 3946.85,3833.67 3946.85,3798.63 R12.1@4005.91,3798.63
FB18: R4.2 R6.1 U13.7 | length 211.5
  Top Layer w11.81: R4.2@492.13,3787.6 R6.1@551.18,3787.6
  Top Layer w15: U13.7@478.74,3876.19 478.74,3835.64 492.13,3822.25 492.13,3788.79 550,3788.79 R6.1@551.18,3787.6
FB25_AUX: R15.2 R17.1 U12.7 | length 147.9
  Top Layer w15: R17.1@3564.57,2723.82 3623.62,2723.82 3623.62,2690.36 3638.58,2675.4 U12.7@3638.58,2641.15
FB25_SFP: R1.2 R3.1 U20.7 | length 183.2
  Top Layer w15: R3.1@3352.36,421.27 3352.36,480.32 3469.29,480.32 U20.7@3474.41,485.44